# Altium PCB Low noise PSU.PcbDoc
Units mm, origin at the board's own origin, x right, y up, seen from the top; angles counter-clockwise.
Board outline 68 x 99 mm, 2 copper layers (Top Layer, Bottom Layer); 14 components, 5 nets, 39 pads, 0 vias.
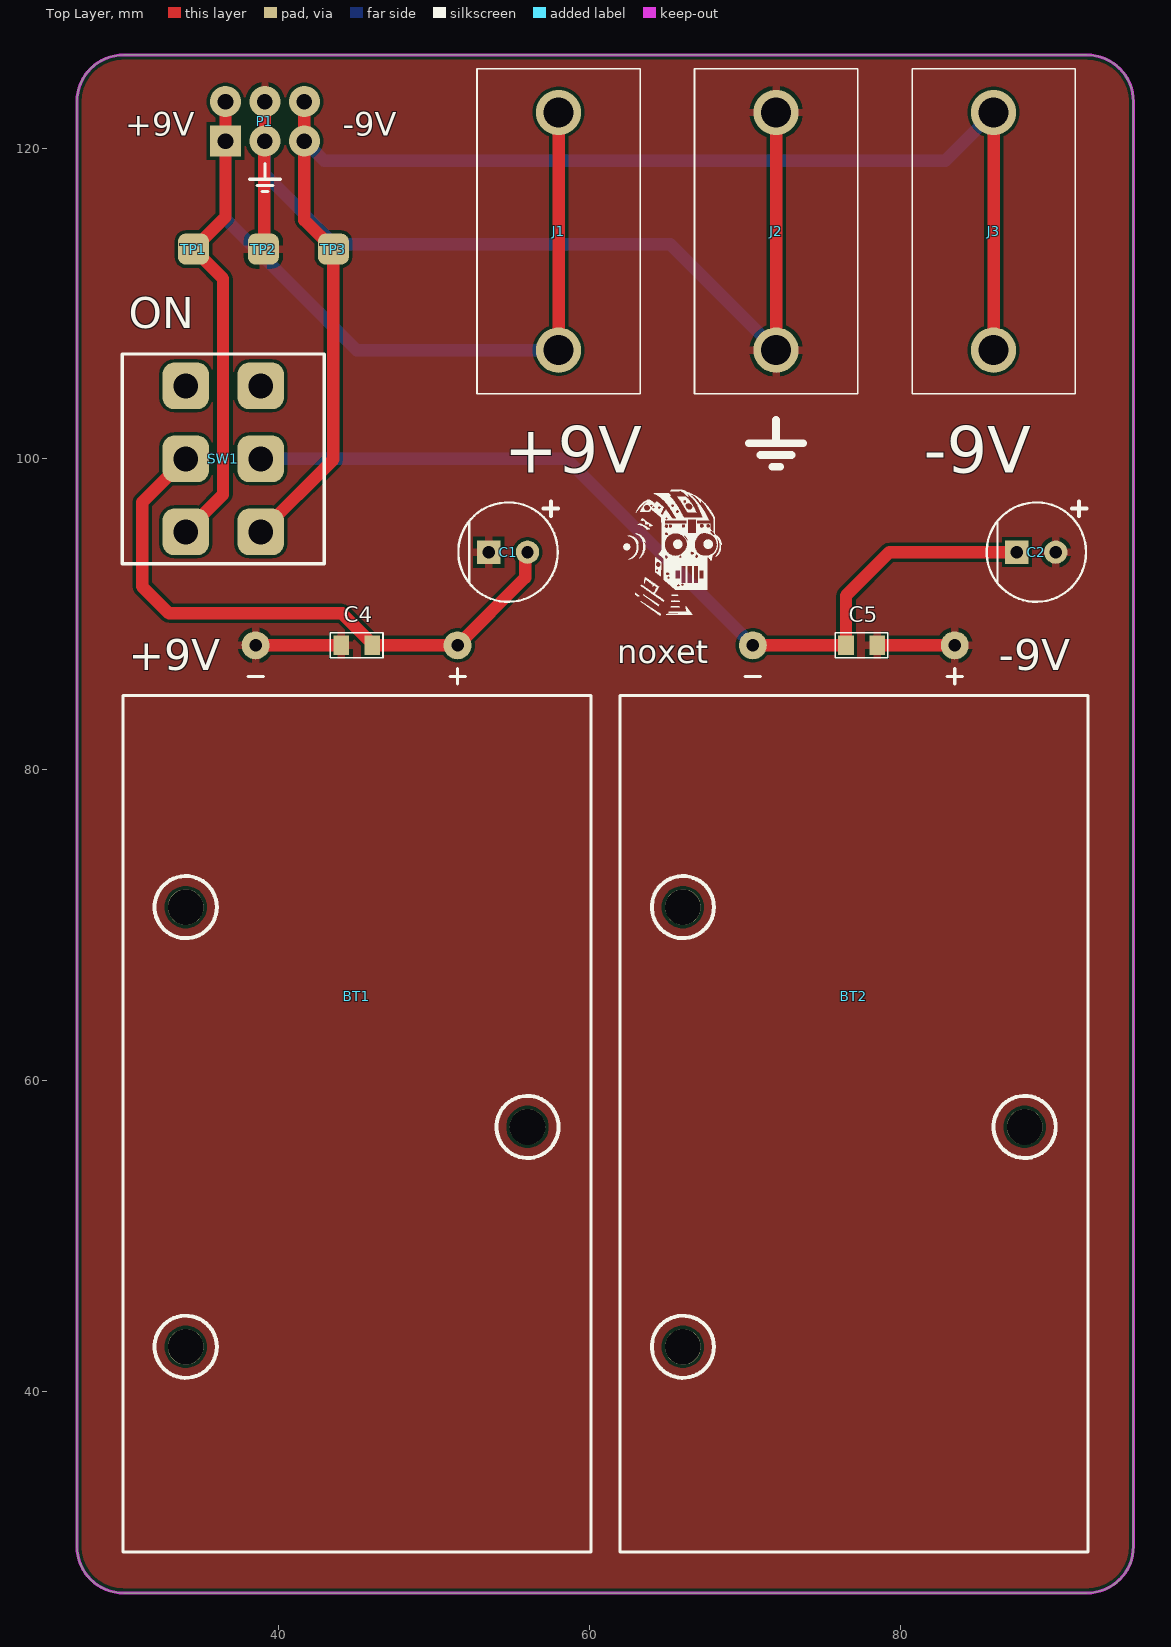
[diagram p0: Top Layer view]
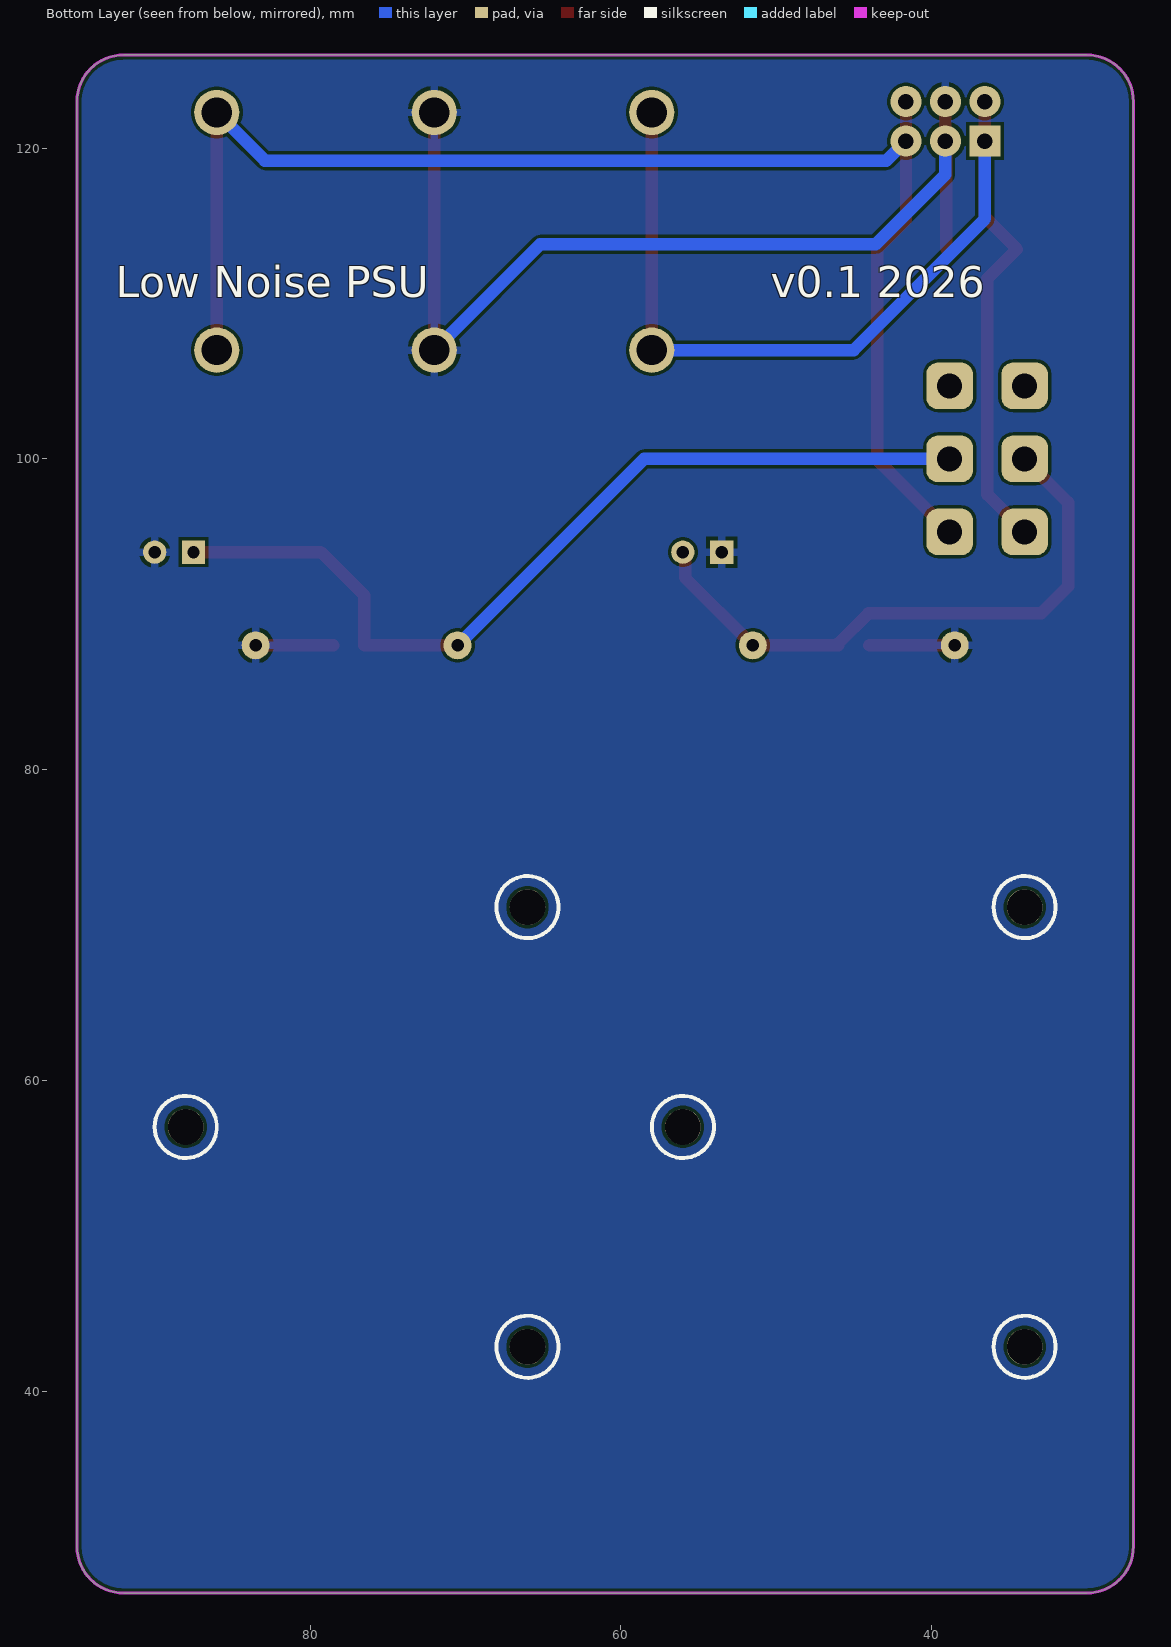
[diagram p1: Bottom Layer view, seen from below]
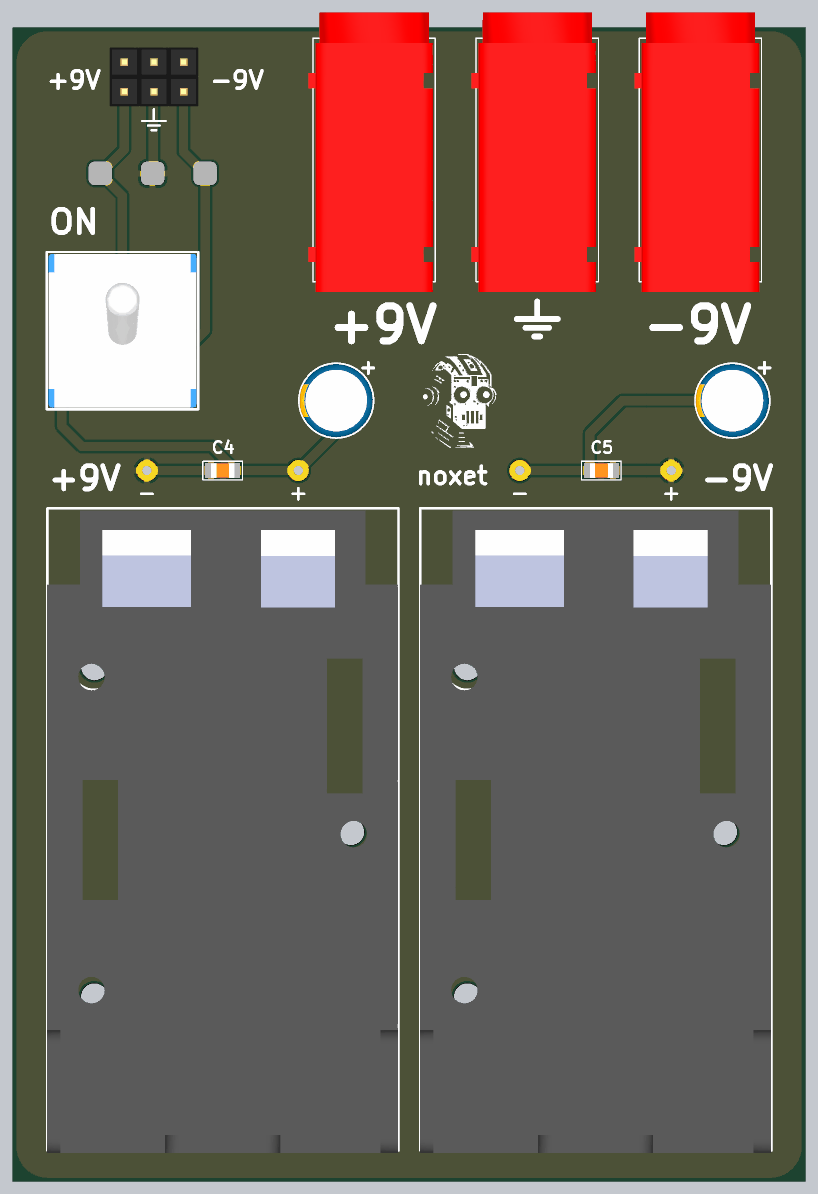
[diagram p2: 3D render of the assembled board from above, using the file's embedded part models]

## Layer stack, top to bottom
Top Solder: solder mask 0.0102, Solder Resist, Dk 3.5
Top Layer: signal copper 0.0356
Dielectric 1: dielectric 0.32, FR-4, Dk 4.8
Bottom Layer: signal copper 0.0356
Bottom Solder: solder mask 0.0102, Solder Resist, Dk 3.5

## Board outline
27,30 27,123 cw(c30,123) 30,126 92,126 cw(c92,123) 95,123 95,30 cw(c92,30) 92,27 30,27 cw(c30,30)

## Design rules (kind name [scope] priority, off if disabled: settings)
BoardOutlineClearance [All] p1: gap=0.3 ignorepadtopadclearanceinfootprint=FALSE except(0.4: Arc-SplitBarrior Arc-SplitContinuation Track-SplitBarrior Track-SplitContinuation SMDPad-SplitBarrior SMDPad-SplitContinuation THPad-SplitBarrior THPad-SplitContinuation Via-SplitBarrior Via-SplitContinuation Fill-SplitBarrior Fill-SplitContinuation Poly-SplitBarrior Poly-SplitContinuation Region-SplitBarrior Region-SplitContinuation Text-SplitBarrior Text-SplitContinuation)
Clearance [All] p1: gap=0.2 ignorepadtopadclearanceinfootprint=FALSE except(0.1: Arc-Arc Arc-Track Track-Track; 0.127: SMDPad-SMDPad SMDPad-Via THPad-Via Via-Via; 0.15: SMDPad-Text THPad-Text Via-Text; 0.254: Arc-Via Arc-Text Track-Via Track-Text SMDPad-THPad Fill-Text Poly-Text Region-Text Text-Text; 0.5: THPad-THPad)
Height [All] p1: minheight=0 maxheight=50 prefheight=12.7
HoleSize [All] p1: absolutevalues=TRUE maxlimit=6.3 minlimit=0.2 maxpercent=80.000 minpercent=20.000
HoleToHoleClearance [All] p1: gap=0.254 allowstackedmicrovias=FALSE
MinimumAnnularRing [All] p1: minimumring=0.13
MinimumSolderMaskSliver [All] p1: minsoldermaskwidth=0.13 // Black and white soldermask has 0.13, instead of 0.1mm
PolygonConnect PolygonConnect_1 [All] p1: thpad.connectstyle=Relief thpad.reliefconductorwidth=0.508 thpad.reliefentries=4 thpad.polygonreliefangle="90 Angle" thpad.airgapwidth=0.254 smdpad.connectstyle=Relief smdpad.reliefconductorwidth=0.508 smdpad.reliefentries=4 smdpad.polygonreliefangle="90 Angle" smdpad.airgapwidth=0.254 via.connectstyle=Direct via.reliefconductorwidth=0.508 via.reliefentries=4 via.polygonreliefangle="90 Angle" via.airgapwidth=0.254
RoutingCorners [All] p1: cornerstyle=Round minsetback=2.54 maxsetback=2.54
RoutingVias [All] p1: holewidth=0.5 width=1 viastyle="Through Hole" minholewidth=0.2 minwidth=0.35 maxholewidth=1 maxwidth=2
SilkToSilkClearance [All] p1: silktosilkclearance=0.1
SilkToSolderMaskClearance [IsPad] p1: minsilkscreentomaskgap=0.1 clearancetoexposedcopper=TRUE
SolderMaskExpansion [All] p1: expansion=0.05 istentingtop=FALSE
SupplyNets "Schematic Supply Nets_2" [InNet('VCC')] p1: voltage=0.000
SupplyNets "Schematic Supply Nets_1" [InNet('GND')] p2: voltage=0.000
SupplyNets "Schematic Supply Nets" [InNet('VEE')] p3: voltage=0.000
Width [All] p1: maxlimit=2.54 minlimit=0.1 preferedwidth=0.8 minimp=50.000000 maximp=50.000000 favimp=50.000000
23 further rules are at their usual default settings.

## Components (designator, comment, footprint, x,y, rotation, side; value= is the part's Value field where it differs from the comment)
BT1 "9V" Battery_Holder_9V 45,57 r90 top locked
BT2 "9V" Battery_Holder_9V 77,57 r90 top locked
C1 "Capacitor, TH Polarized" "Capacitor TH 6.3x12.5mm P2.5mm" 53.5,94 r0 top value=47u
C2 "Capacitor, TH Polarized" "Capacitor TH 6.3x12.5mm P2.5mm" 87.5,94 r0 top value=47u
C4 "0805, capacitor" "0805, cap" 46,88 r180 top value=100n
C5 "0805, capacitor" "0805, cap" 78.5,88 r180 top value=100n
J1 "571-0100" "Banana Conn VCC" 58,107 r90 top
J2 "571-0100" "Banana Conn VCC" 72,107 r90 top
J3 "571-0100" "Banana Conn VCC" 86,107 r90 top
P1 "2x3 Pin Header" "2x3 PH" 36.56,120.46 r0 top value="2x3 Pin Header, 2.54mm"
SW1 "DPDT" SW_DPDT_MTS-202-A2 34,95.3 r0 top
TP1 "Test Point" TESTPOINT_SMD 34.5,113.5 r90 top value="Test point"
TP2 "Test Point" TESTPOINT_SMD 39,113.5 r90 top value="Test point"
TP3 "Test Point" TESTPOINT_SMD 43.5,113.5 r90 top value="Test point"

## Footprints (in the part's own frame and the unit in brackets; to place one, negate y for a bottom-side part, rotate by r counter-clockwise, add the part's x,y. Pads: shape width x height; smd on the part's side, far side on the other; paste and mask are expansions set on the pad)
"2x3 PH" [mm] "2x3 Pin Header, 2.54 pitch"
  rect 2x2 hole 1: 1(0,0)
  round 2 hole 1: 2(2.54,0) 3(5.08,0) 4(5.08,2.54) 5(2.54,2.54) 6(0,2.54)
  body extent -1.26,-1.22 6.36,3.86, height 8.45
"0805, cap" [mm]
  rect 1x1.25 smd: 1(0,0) 2(2,0)
  silkscreen extent -0.7,-0.8 2.7,0.8, body extent -0.01,-0.62 1.99,0.63, height 0.8
"Banana Conn VCC" [mm] "571-0100"
  round 2.91 hole 1.94: 1(0,0) 1(15.3,0)
  silkscreen extent -2.8,-5.25 18.1,5.25, body extent -3.7,-5.05 20.3,5.65, height 13
Battery_Holder_9V [mm]
  round 1.8 hole 0.8: N(31,6.5) P(31,-6.5)
  round 2.3 hole 2.3 unplated: ""(-14.15,11) ""(0,-11) ""(14.15,11)
  silkscreen extent -27.36,-15.09 29.5,15.04, body extent -27.56,-15.06 27.56,15.06, height 21.46
"Capacitor TH 6.3x12.5mm P2.5mm" [mm] "Generic electrolytic radial"
  rect 1.5x1.5 hole 0.8: 1(0,0)
  round 1.5 hole 0.8: 2(2.5,0)
  silkscreen extent -1.95,-3.2 4.47,3.27, body extent -1.91,-3.15 4.4,3.15, height 12.51
SW_DPDT_MTS-202-A2 [mm] "Toggle switch DPDT"
  rrect50% 3x3 hole 1.6: 1(0,0) 2(0,4.7) 3(0,9.4) 4(4.83,0) 5(4.83,4.7) 6(4.83,9.4)
  silkscreen extent -4.09,-2.05 8.91,11.45, body extent -3.94,-1.9 8.76,11.3, height 28.94
TESTPOINT_SMD [mm] "Diameter 2mm, Hole 0.3mm"
  rrect50% 2x2 smd: 0(0,0)

## Part data
BT1 BT2: library part "Battery Holder 9V", "Electrokit art nr: 41003388"
C1 C2: "Capacitor TH Polarized", Order number=3335618, Supplier=Farnell
J1 J2 J3: library part "Banana conn", "Banana Connector 571-0100", Manufacturer_Name=Deltron, Mouser Part Number=164-6218, Datasheet Link=https://www.dem-uk.com/deltron-components/Data/Product_Downloads/deltron-571-0100-4mm-90deg-single-socket-data.pdf, Height=12.4mm, Manufacturer_Part_Number=571-0100, Mouser Price/Stock=https://www.mouser.com/Search/Refine.aspx?Keyword=164-6218
SW1: library part "Switch DPDT", "Toggle switch DPDT"
TP1 TP2 TP3: Farnell=1702006

## Nets (pads, with @x,y where several pads share a name; then routed paths per layer and width w, separated by ;. In a path a pad name is that pad's centre, name@x,y a point inside that pad or via, vN(x,y) a via of type N, cw(c..) or ccw(c..) an arc to the next point about the centre after c; other vN are vias at no path point)
GND: BT1.N BT2.P C1.1 C2.2 C4.2 C5.1 J2.1 P1.2 P1.5 TP2.0 | length 75.1
  Top Layer w0.8: BT1.N C4.2 ; TP2.0 39.05,113.55 39.05,120.41 P1.2 P1.5 ; J2.1@72,107 J2.1@72,122.3 ; C5.1 BT2.P
  Bottom Layer w0.8: P1.2 39.1,118.3 43.595,113.805 65.195,113.805 J2.1@72,107
VCC: BT1.P C1.2 C4.1 SW1.2 | length 39.2
  Top Layer w0.8: SW1.2 31.2,97.2 31.2,91.8 32.938,90.062 44.062,90.062 46,88.125 C4.1 BT1.P 55.85,92.35 55.85,93.85 C1.2
VCC_SW: J1.1 P1.1 P1.6 SW1.1 TP1.0 | length 75.6
  Top Layer w0.8: SW1.1 36.4,97.7 36.4,111.6 TP1.0 36.56,115.56 P1.1 P1.6 ; J1.1@58,107 J1.1@58,122.3
  Bottom Layer w0.8: P1.1 36.56,115.44 45,107 J1.1@58,107
VEE: BT2.N C2.1 C5.2 SW1.5 | length 58
  Top Layer w0.8: BT2.N C5.2 76.5,91.2 79.3,94 C2.1
  Bottom Layer w0.8: SW1.5 58.5,100 BT2.N
VEE_SW: J3.1 P1.3 P1.4 SW1.4 TP3.0 | length 91.9
  Top Layer w0.8: SW1.4 43.5,99.97 TP3.0 41.64,115.36 P1.3 P1.4 ; J3.1@86,107 J3.1@86,122.3
  Bottom Layer w0.8: P1.3 42.9,119.2 82.9,119.2 J3.1@86,122.3
pads on no net: BT1. BT2. SW1.3 SW1.6

## Polygon pours and split planes (outlines as drawn)
GND on Bottom Layer "GND_L02_P000" (solid, pour order 0): 25,140 97,140 97,23 25,23
GND on Top Layer "GND_L01_P001" (solid, pour order 1): 24,139 97,139 97,20 24,20

## Keep-outs
Keep-Out Layer:
  the board outline again, w0.2

## Silkscreen, mask and mechanical layers (free items; w line width, h text height)
Top Overlay:
  drawing of 26 lines, arcs and shapes, not listed
  text "+9V" at 30.101,120.8 h1.5
  text "-9V" at 44.101,120.8 h1.5
  text "ON" at 30.334,108.4 h2
  text "+9V" at 54.501,99.1 h3
  text "-9V" at 81.501,99.1 h3
  text "noxet" at 61.787,86.861 h1.5
  text "+9V" at 30.334,86.4 h2
  text "-9V" at 86.334,86.4 h2
Bottom Overlay:
  text "v0.1 2026" at 50.331,110.4 h2
  text "Low Noise PSU" at 92.496,110.4 h2